# EAGLE board PCB_Boardfile (EAGLE 9.6.2)
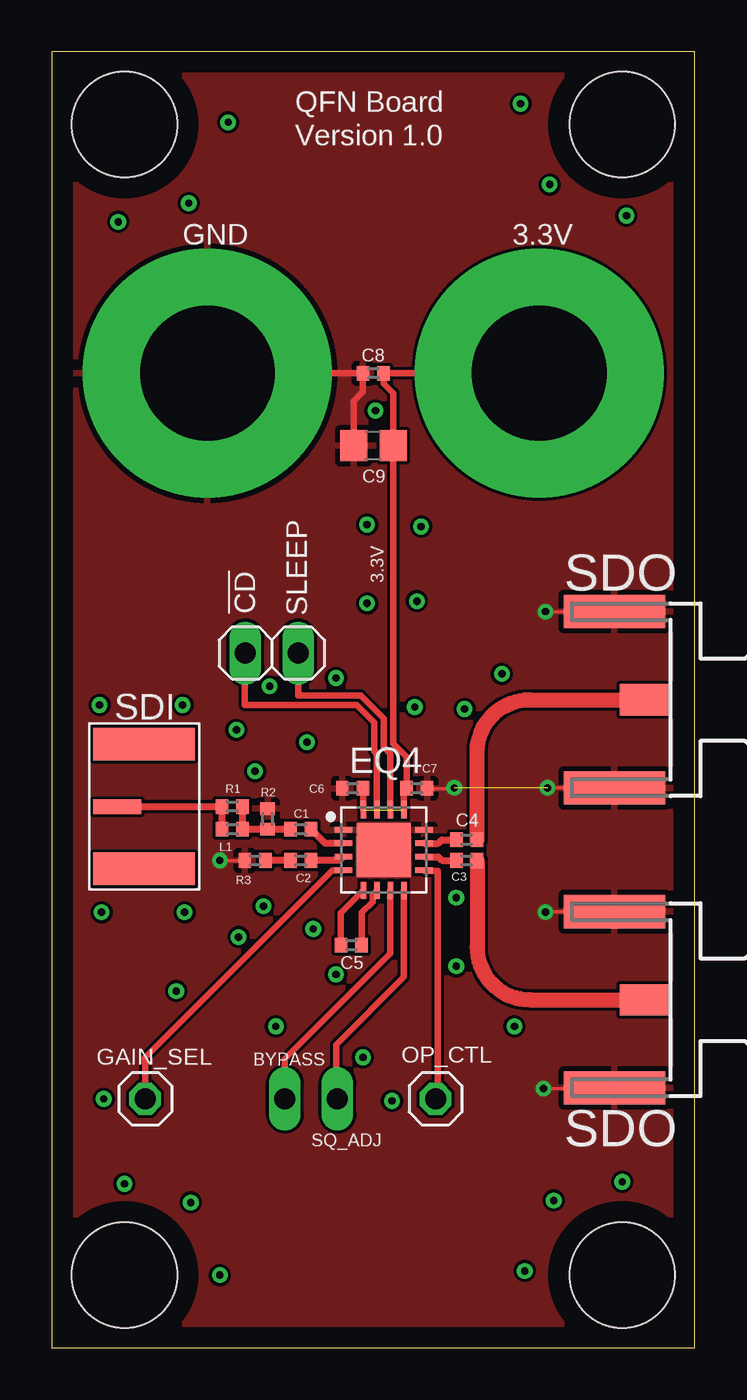
[diagram p0: board, top side]
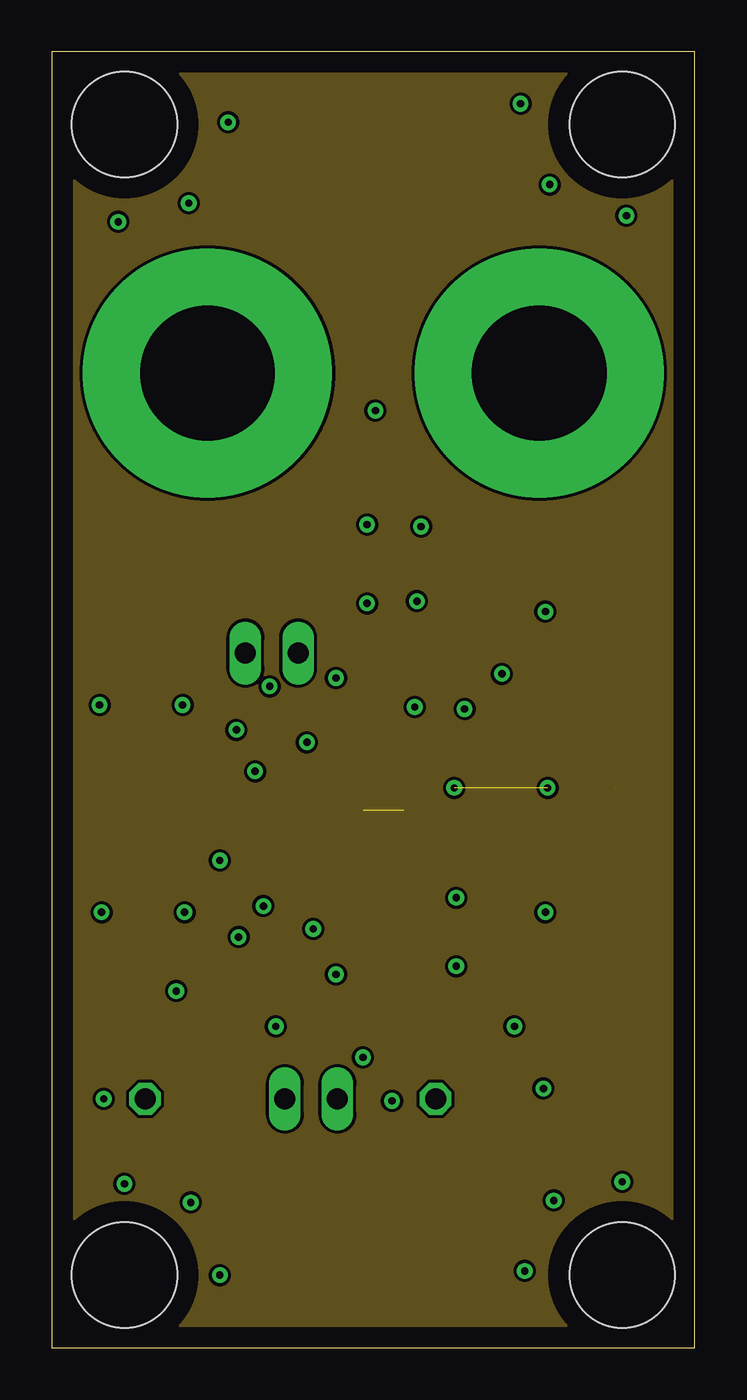
[diagram p1: board, inner layer Route2]
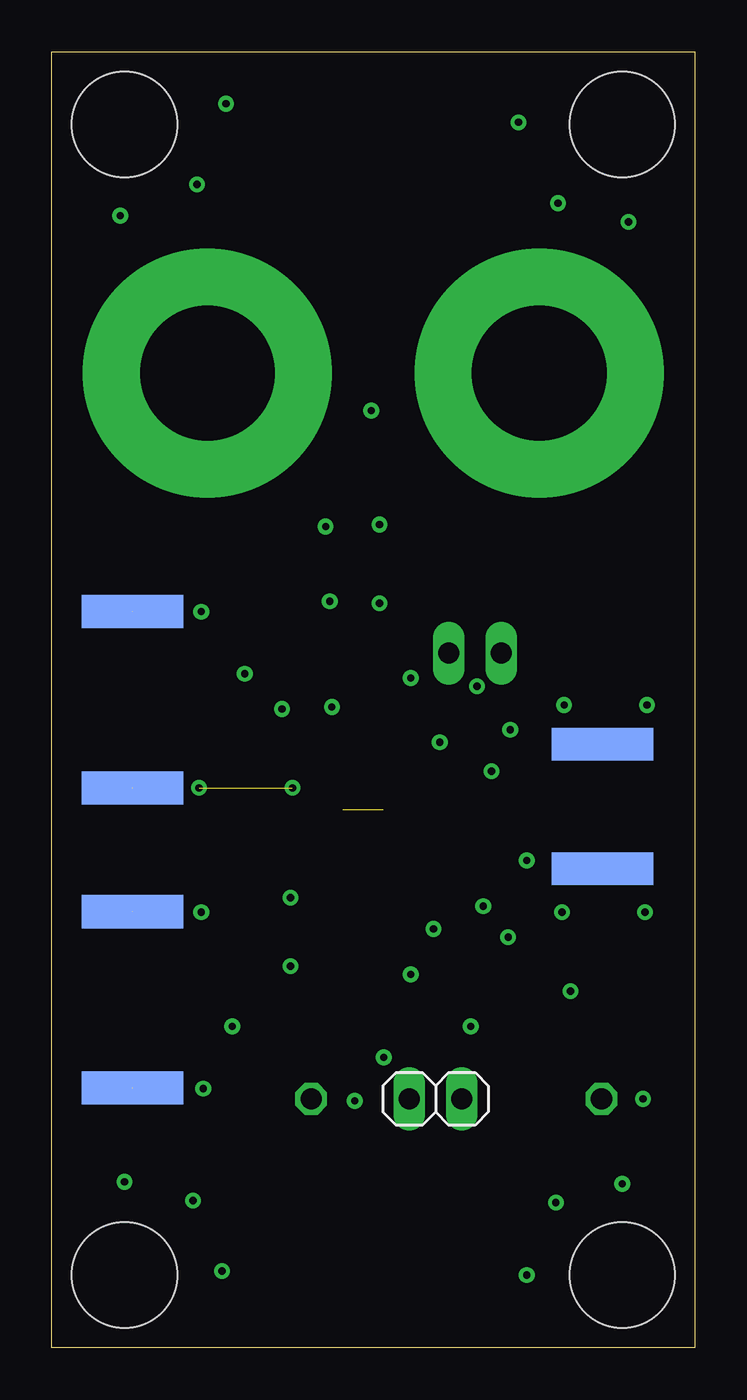
[diagram p2: board, bottom side, seen from below]

Size 31 x 62.5 mm. Coordinates in mm from the lower left corner, seen from the top.
Outline: 0,0 31,0 31,62.5 0,62.5 0,0
Copper layers (1+2*15+16): Top 0.018mm / dielectric 0.4mm / Route2 0.035mm / dielectric 0.71mm / Route15 0.035mm / dielectric 0.4mm / Bottom 0.018mm
Design rules "default *": minimum track width 6mil, minimum drill 0.35mm, track to track 6mil, track to pad 6mil, pad to pad 6mil, via to via 6mil, smd to smd 6mil, copper to edge 40mil, drill to drill 6mil, minimum pad ring 10mil, minimum via ring 8mil, stop-mask expansion 4mil, vias tented up to drill 0mil, thermal gap 10mil
Net classes: 1 50ohmtl: width 0.723 mm; 2 75ohmtl: width 0.344 mm
Holes 5.08 mm at 3.5,59 27.5,59 27.5,3.5 3.5,3.5

## Footprints (pad centres in the part's own frame; a part is rotated, then mirrored left to right if it is on the bottom)
1X02 = drill 1.016 long: 1 -1.27,0; 2 1.27,0
0402 = smd 0.6 x 0.7: 1 -0.5,0; 2 0.5,0
C0805 = smd 1.3 x 1.5: 1 -0.95,0; 2 0.95,0
QFN65P400X400X90-17T260N = smd 0.838 x 0.27: 1 -1.946,0.975; 2 -1.946,0.325; 3 -1.946,-0.325; 4 -1.946,-0.975; 9 1.946,-0.975; 10 1.946,-0.325; 11 1.946,0.325; 12 1.946,0.975 | smd 0.27 x 0.838: 5 -0.975,-1.946; 6 -0.325,-1.946; 7 0.325,-1.946; 8 0.975,-1.946; 13 0.975,1.946; 14 0.325,1.946; 15 -0.325,1.946; 16 -0.975,1.946 | smd 2.6 x 2.6: 17 0,0
1X01 = drill 1.016 octagon: 1 0,0
4MM = drill 6.5 pad 12: 1 0,0
034_1018_12G = smd 1.58 x 4.9: G@1 -3,2.45; G@2 3,2.45 | smd 1.58 x 4.9 bottom: G@3 -3,2.45; G@4 3,2.45 | smd 0.7 x 2.3: P$1 0,1.15
SMA = smd 2.35 x 1.5: 1 1.175,0 | smd 4.9 x 1.6: G@1 2.6,4.25; G@2 2.6,-4.25 | smd 4.9 x 1.6 bottom: G@3 2.6,4.25; G@4 2.6,-4.25

## Placement (x,y rotation side)
BYPASS/SQ_ADJ  [1X02]  12.5,12 0 bottom
C1  C0402  [0402]  12,25 0 top
C2  C0402  [0402]  12,23.5 0 top
C3  C0402  [0402]  20,23.5 0 top
C4  C0402  [0402]  20,24.5 0 top
C5  C0402  [0402]  14.44,19.42 0 top
C6  C0402  [0402]  14.5,26.98 180 top
C7  C0402  [0402]  17.59,26.98 0 top
C8  C0402  [0402]  15.5,47 180 top
C9  [C0805]  15.5,43.5 180 top
EQ4  GS3440GS3440_1  [QFN65P400X400X90-17T260N]  16,24 0 top
GAIN_SEL  [1X01]  4.5,12 0 top
JP1  [4MM]  7.5,47 0 top
JP2  [4MM]  23.5,47 0 top
JP3  [1X02]  10.6,33.5 0 top
L1  L0402  [0402]  8.7,25 0 top
OP_CTL  [1X01]  18.5,12 0 top
R1  R0402  [0402]  8.7,26.1 0 top
R2  R0402  [0402]  10.4,25.5 90 top
R3  R0402  [0402]  9.8,23.5 0 top
SDI  HD-BNC  [034_1018_12G]  2,26.1 270 top
SDO1  SMA132357  [SMA]  29.72,31.25 180 top
SDO2  SMA132357  [SMA]  29.72,16.78 180 top

## Library data of the parts
BYPASS/SQ_ADJ GAIN_SEL JP3 OP_CTL = pinhead
C1-C8 EQ4 JP1 JP2 L1 R1-R3 SDI SDO1 SDO2 = labHDE_rev3
C9 = rcl; SPICEPREFIX: C

## Nets
33V: C6.1 C7.1 C8.1 C9.1 EQ4.13 EQ4.16 JP2.1
75OHM [75ohmtl]: C1.2 EQ4.2
GND: C6.2 C7.2 C8.2 C9.2 EQ4.1 EQ4.12 EQ4.17 JP1.1 R2.2 R3.1 SDO1.G@1 SDO1.G@2 SDO1.G@3 SDO1.G@4 SDO2.G@1 SDO2.G@2 SDO2.G@3 SDO2.G@4
N$1: C5.2 EQ4.6
N$2: C1.1 L1.2 R1.2 R2.1
N$3: C3.1 EQ4.10
N$4: C2.2 EQ4.3
N$5: EQ4.4 GAIN_SEL.1
N$6: C2.1 R3.2
N$7: EQ4.15 JP3.1
N$9: C4.1 EQ4.11
N$10 [50ohmtl]: C4.2 SDO1.1
N$11: EQ4.14 JP3.2
N$12: C5.1 EQ4.5
N$14 [50ohmtl]: C3.2 SDO2.1
N$15 [75ohmtl]: L1.1 R1.1 SDI.P$1
N$16: BYPASS/SQ_ADJ.2 EQ4.7
N$17: BYPASS/SQ_ADJ.1 EQ4.8
N$18: EQ4.9 OP_CTL.1

## Tracks (layer width: path | path; a pad name or v marks a point on that pad's centre or on a via)
33V  (1 unrouted)
  Top 0.305: JP2.1 C8.1 16,46.5 16.45,46.05 C9.1 16.45,29.15 17.1,28.5 C7.1 16.98,26.86 EQ4.13 | C6.1 15.02,26.95 EQ4.16
75OHM
  Top 0.344: EQ4.2 13.18,24.32 C1.2
+3.3V
  pour Route2 (isolate 0.012): 0,62.5 0,0 31,0 31,62.5
GND  (via drill 0.35)  (5 unrouted)
  Top 0.152: SDO1.G@3 v23.9,27 | v23.8,35.5 SDO1.G@4 | C7.2 19.38,26.98 v19.4,27 | v8.1,23.5 R3.1 | v23.8,21 23.83,21.03 SDO2.G@4 | v23.7,12.5 27.09,12.5 SDO2.G@3
  Top 0.305: JP1.1 C8.2 15,46.1 14.55,45.65 C9.2
  pour Top (isolate 0.012, rank 4): -0.1,62.5 31,62.5 31,0 0,0 0,62.4
N$1
  Top 0.305: EQ4.6 15.46,21.84 15.46,21.51 14.94,20.98 C5.2
N$2
  Top 0.344: C1.1 R2.1 L1.2 R1.2
N$3
  Top 0.344: EQ4.10 18.62,23.68 18.8,23.5 C3.1
N$4
  Top 0.344: EQ4.3 13.88,23.5 C2.2
N$5
  Top 0.305: EQ4.4 13.52,23.02 4.5,14 GAIN_SEL.1
N$6
  Top 0.344: C2.1 R3.2
N$7
  Top 0.305: JP3.1 9.3,33.47 9.3,31 14.7,31 15.54,30.16 15.54,28.77 15.68,28.63 EQ4.15
N$8  (via drill 0.35)
  other vias: 22.8,3.7
N$9
  Top 0.344: EQ4.11 18.62,24.32 18.8,24.5 C4.1
N$10
  Top 0.723: C4.2 20.5,28.71 arc-90 23.04,31.25 SDO1.1
N$11
  Top 0.305: JP3.2 11.87,31.46 14.89,31.46 15.99,30.35 15.99,28.96 16.32,28.63 EQ4.14
N$12
  Top 0.305: EQ4.5 13.94,20.97 C5.1
N$13  (via drill 0.35)
  other vias: 24.2,7.1
N$14
  Top 0.723: C3.2 20.5,19.32 arc90 23.04,16.78 SDO2.1
N$15
  Top 0.344: SDI.P$1 R1.1 L1.1
N$16
  Top 0.305: EQ4.7 16.32,19.02 11.23,13.93 BYPASS/SQ_ADJ.2
N$17
  Top 0.305: EQ4.8 16.98,17.88 13.7,14.6 13.7,12.07 BYPASS/SQ_ADJ.1
N$18
  Top 0.305: EQ4.9 17.97,23 18.6,23 18.6,12.1 OP_CTL.1
N$19  (via drill 0.35)
  other vias: 27.5,8
N$20  (via drill 0.35)
  other vias: 8.1,3.5
N$21  (via drill 0.35)
  other vias: 6.7,7
N$22  (via drill 0.35)
  other vias: 3.5,7.9
N$23  (via drill 0.35)
  other vias: 8.5,59.1
N$24  (via drill 0.35)
  other vias: 6.6,55.2
N$25  (via drill 0.35)
  other vias: 3.2,54.3
N$26  (via drill 0.35)
  other vias: 27.7,54.6
N$27  (via drill 0.35)
  other vias: 24,56.1
N$28  (via drill 0.35)
  other vias: 22.6,60
N$29  (via drill 0.35)
  other vias: 15.6,45.2
N$30  (via drill 0.35)
  other vias: 10.5,31.9
N$31  (via drill 0.35)
  other vias: 13.7,32.3
N$32  (via drill 0.35)
  other vias: 9.8,27.8
N$33  (via drill 0.35)
  other vias: 15.2,35.9
N$34  (via drill 0.35)
  other vias: 15.2,39.7
N$35  (via drill 0.35)
  other vias: 17.8,39.6
N$36  (via drill 0.35)
  other vias: 17.6,36
N$37  (via drill 0.35)
  other vias: 12.3,29.2
N$38  (via drill 0.35)
  other vias: 17.5,30.9
N$39  (via drill 0.35)
  other vias: 19.9,30.8
N$40  (via drill 0.35)
  other vias: 21.7,32.5
N$41  (via drill 0.35)
  other vias: 8.9,29.8
N$42  (via drill 0.35)
  other vias: 19.5,21.7
N$43  (via drill 0.35)
  other vias: 19.5,18.4
N$45  (via drill 0.35)
  other vias: 22.3,15.5
N$46  (via drill 0.35)
  other vias: 16.4,11.9
N$47  (via drill 0.35)
  other vias: 15,14
N$49  (via drill 0.35)
  other vias: 13.7,18
N$51  (via drill 0.35)
  other vias: 10.8,15.5
N$52  (via drill 0.35)
  other vias: 12.6,20.2
N$53  (via drill 0.35)
  other vias: 10.2,21.3
N$54  (via drill 0.35)
  other vias: 9,19.8
N$56  (via drill 0.35)
  other vias: 6,17.2
N$58  (via drill 0.35)
  other vias: 2.5,12
N$59  (via drill 0.35)
  other vias: 2.4,21
N$60  (via drill 0.35)
  other vias: 6.4,21
N$61  (via drill 0.35)
  other vias: 2.3,31
N$63  (via drill 0.35)
  other vias: 6.3,31

## Text on the board
tPlace: QFN Board / Version 1.0
tNames: GND | 3.3V | 3.3V | SDO | !CD | SLEEP | BYPASS | SQ_ADJ | SDO